# EAGLE board PIC32 dev board (EAGLE 6.5.0)
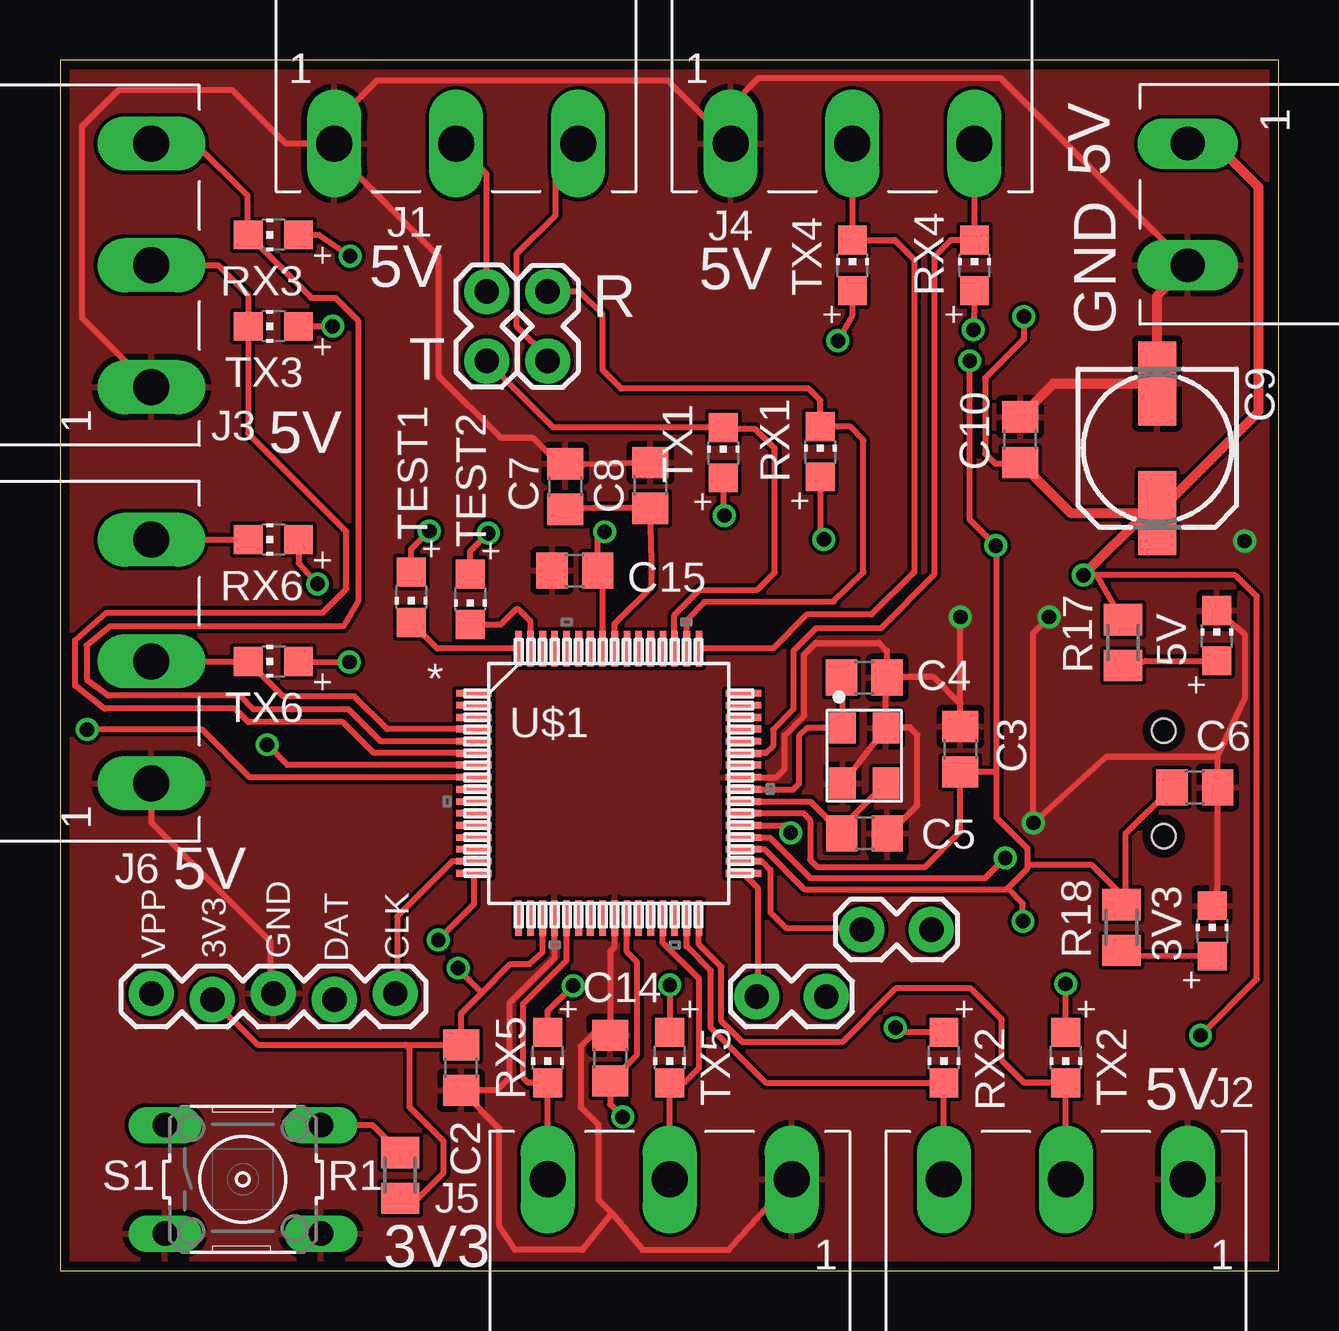
[diagram p0: board, top side]
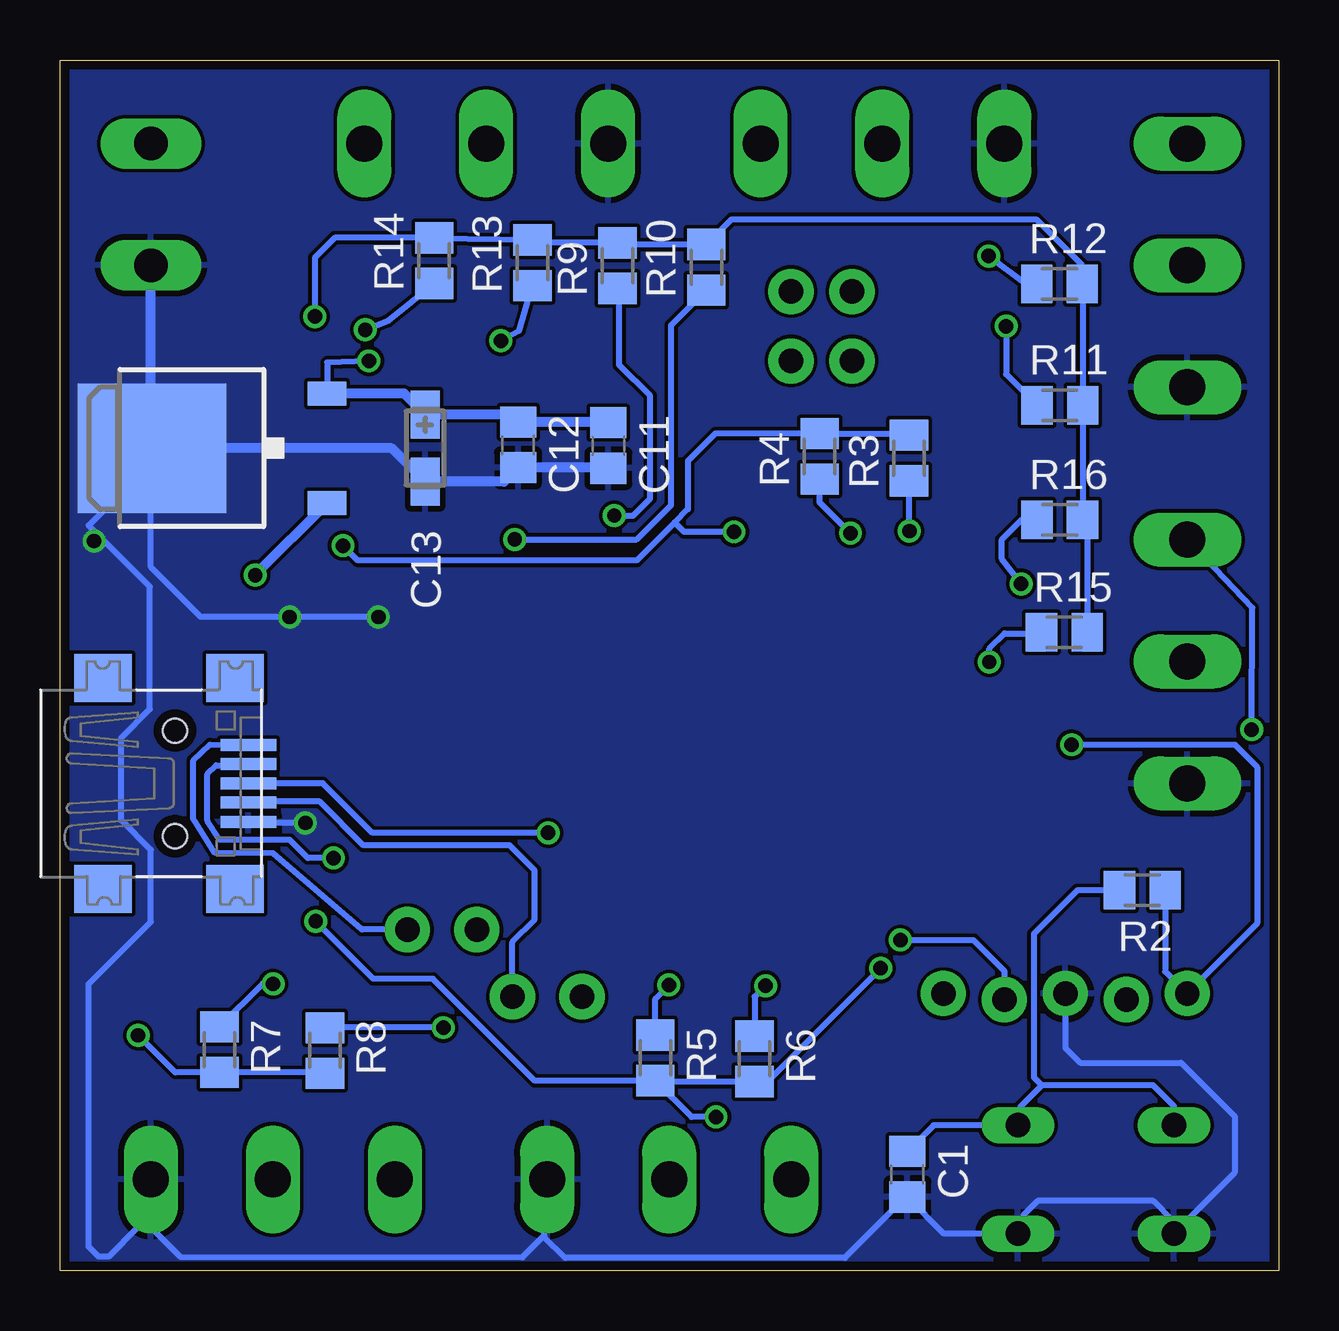
[diagram p1: board, bottom side, seen from below]

Size 50.78 x 50.47 mm. Coordinates in mm from the lower left corner, seen from the top.
Outline: 0,0 50.78,0 50.78,50.47 0,50.47 0,0
Copper layers (1*16): Top 0.0356mm / dielectric 1.5011mm / Bottom 0.0356mm
Design rules "LaenPCBOrder": minimum track width 6mil, minimum drill 13mil, track to track 6mil, track to pad 6mil, pad to pad 6mil, via to via 6mil, smd to smd 6mil, copper to edge 15mil, drill to drill 6mil, minimum pad ring 7mil, minimum via ring 7mil, stop-mask expansion 3mil, vias tented up to drill 0mil, thermal gap 10mil

## Footprints (pad centres in the part's own frame; a part is rotated, then mirrored left to right if it is on the bottom)
CHIP-LED0805 = smd 1.2 x 1.2: A 0,-1.05; C 0,1.05
C0805 = smd 1.3 x 1.5: 1 -0.95,0; 2 0.95,0
153CLV-0605 = smd 3.5 x 1.6: + 2.7,0; - -2.7,0
CT3216 = smd 2 x 1.2: + -1.4,0; - 1.4,0
USB-MINIB = smd 0.5 x 2.308: D+ 0,4.064; D- -0.8,4.064; GND 1.6,4.064; ID 0.8,4.064; VBUS -1.6,4.064 | smd 2 x 2.4: GND1 -4.4,-2; GND2 -4.4,3.5; GND3 4.4,3.5; GND4 4.4,-2 | hole 1: -2.2,1; 2.2,1
ECX-32 = smd 1.3 x 1.1: 1 -1.15,-0.9; 2 1.15,-0.9; 3 1.15,0.9; 4 -1.15,0.9
M3 = drill 1.5 long: 1 -5.08,0; 2 0,0; 3 5.08,0
M2 = drill 1.4 long: 1 -2.54,0; 2 2.54,0
1X05_LOCK = drill 1.016 pad 1.88: 1 0,0.127; 2 2.54,-0.127; 3 5.08,0.127; 4 7.62,-0.127; 5 10.16,0.127
1X02_LOCK = drill 1.016 pad 1.88: 1 -0.178,0; 2 2.718,0
M0805 = smd 1.3 x 1.6: 1 -0.95,0; 2 0.95,0
B3F-10XX = drill 1.016 long: 1 -3.251,2.261; 2 3.251,2.261; 3 -3.251,-2.261; 4 3.251,-2.261
TQFP64_10X10MC = smd 1.473 x 0.279: 1 -5.613,3.759; 2 -5.613,3.251; 3 -5.613,2.743; 4 -5.613,2.261; 5 -5.613,1.753; 6 -5.613,1.245; 7 -5.613,0.762; 8 -5.613,0.254; 9 -5.613,-0.254; 10 -5.613,-0.762; 11 -5.613,-1.245; 12 -5.613,-1.753; 13 -5.613,-2.261; 14 -5.613,-2.743; 15 -5.613,-3.251; 16 -5.613,-3.759; 33 5.613,-3.759; 34 5.613,-3.251; 35 5.613,-2.743; 36 5.613,-2.261; 37 5.613,-1.753; 38 5.613,-1.245; 39 5.613,-0.762; 40 5.613,-0.254; 41 5.613,0.254; 42 5.613,0.762; 43 5.613,1.245; 44 5.613,1.753; 45 5.613,2.261; 46 5.613,2.743; 47 5.613,3.251; 48 5.613,3.759 | smd 0.279 x 1.473: 17 -3.759,-5.613; 18 -3.251,-5.613; 19 -2.743,-5.613; 20 -2.261,-5.613; 21 -1.753,-5.613; 22 -1.245,-5.613; 23 -0.762,-5.613; 24 -0.254,-5.613; 25 0.254,-5.613; 26 0.762,-5.613; 27 1.245,-5.613; 28 1.753,-5.613; 29 2.261,-5.613; 30 2.743,-5.613; 31 3.251,-5.613; 32 3.759,-5.613; 49 3.759,5.613; 50 3.251,5.613; 51 2.743,5.613; 52 2.261,5.613; 53 1.753,5.613; 54 1.245,5.613; 55 0.762,5.613; 56 0.254,5.613; 57 -0.254,5.613; 58 -0.762,5.613; 59 -1.245,5.613; 60 -1.753,5.613; 61 -2.261,5.613; 62 -2.743,5.613; 63 -3.251,5.613; 64 -3.759,5.613
TO-252 = smd 5.4 x 6.2: GROUND 0,2.5 | smd 1 x 1.6: INPUT -2.28,-4.8; OUTPUT 2.28,-4.8

## Placement (x,y rotation side)
3V3  Green  [CHIP-LED0805]  48,14.17 0 top
5V  Green  [CHIP-LED0805]  48.2,26.48 0 top
C1  0.1 uF ceramic 50v  [C0805]  15.48,4.02 270 bottom
C2  0.1 uF ceramic 50v  [C0805]  16.71,8.47 270 top
C3  0.1 uF ceramic 50v  [C0805]  37.52,21.74 90 top
C4  30 pF ceramic 50v  [C0805]  33.51,24.72 0 top
C5  30 pF ceramic 50v  [C0805]  33.52,18.24 0 top
C6  0.1 uF ceramic 50v  [C0805]  47.28,20.15 0 top
C7  0.1 uF ceramic 50v  [C0805]  21.05,32.69 90 top
C8  optional 10 uF ceramic 50v  [C0805]  24.6,32.73 90 top
C9  100 uF aluminum 16v  [153CLV-0605]  45.72,34.29 270 top
C10  0.1 uF ceramic 50v  [C0805]  40.01,34.64 90 top
C11  0.1 uF ceramic 50v  [C0805]  27.93,34.4 270 bottom
C12  optional 0.1 uF ceramic 50v  [C0805]  31.69,34.42 270 bottom
C13  10uF tantilum 16v  [CT3216]  35.56,34.29 270 bottom
C14  0.1 uF ceramic 50v  [C0805]  22.93,8.86 90 top
C15  0.1 uF ceramic 50v  [C0805]  21.45,29.18 180 top
CN1  [USB-MINIB]  46.99,20.32 270 bottom
ECS-240-20-33-TR  CRYSTAL  [ECX-32]  33.51,21.47 270 top
J1  EUROMAG-390DEG  [M3]  16.51,46.99 0 top
J2  EUROMAG-390DEG  [M3]  41.91,3.81 180 top
J3  EUROMAG-390DEG  [M3]  3.81,41.91 90 top
J4  EUROMAG-390DEG  [M3]  33.02,46.99 0 top
J5  EUROMAG-390DEG  [M3]  25.4,3.81 180 top
J6  EUROMAG-390DEG  [M3]  3.81,25.4 90 top
J7  EUROMAG-290DEG  [M2]  46.99,44.45 270 top
JP1  [1X05_LOCK]  3.81,11.43 0 top
JP2  M02LOCK  [1X02_LOCK]  31.75,11.43 180 top
JP3  M02LOCK  [1X02_LOCK]  20.32,38.1 90 top
JP4  M02LOCK  [1X02_LOCK]  17.78,40.64 270 top
JP5  M02LOCK  [1X02_LOCK]  36.13,14.22 180 top
R1  10K  [M0805]  14.18,3.98 270 top
R2  499R  [M0805]  5.68,15.86 180 bottom
R3  330R  [M0805]  15.4,33.88 90 bottom
R4  330R  [M0805]  19.13,33.95 90 bottom
R5  665R  [M0805]  25.98,8.87 270 bottom
R6  665R  [M0805]  21.84,8.84 270 bottom
R7  1K  [M0805]  44.13,9.22 270 bottom
R8  1K  [M0805]  39.74,9.18 270 bottom
R9  1K  [M0805]  27.55,41.9 90 bottom
R10  1K  [M0805]  23.85,41.83 90 bottom
R11  1K  [M0805]  9.12,36.08 0 bottom
R12  1K  [M0805]  9.14,41.13 0 bottom
R13  1K  [M0805]  31.09,42.02 90 bottom
R14  1K  [M0805]  35.19,42.11 90 bottom
R15  1K  [M0805]  8.93,26.61 0 bottom
R16  1K  [M0805]  9.13,31.3 0 bottom
R17  1K  [M0805]  44.29,26.18 90 top
R18  665R  [M0805]  44.24,14.31 90 top
RX1  Green  [CHIP-LED0805]  31.68,34.14 0 top
RX2  Green  [CHIP-LED0805]  36.83,8.89 180 top
RX3  Green  [CHIP-LED0805]  8.89,43.18 90 top
RX4  Green  [CHIP-LED0805]  38.1,41.91 0 top
RX5  Green  [CHIP-LED0805]  20.32,8.89 180 top
RX6  Green  [CHIP-LED0805]  8.89,30.48 90 top
S1  [B3F-10XX]  7.62,3.81 0 top
TEST1  Blue  [CHIP-LED0805]  14.63,28.08 180 top
TEST2  Blue  [CHIP-LED0805]  17.1,27.99 180 top
TX1  Red  [CHIP-LED0805]  27.63,34.1 0 top
TX2  Red  [CHIP-LED0805]  41.91,8.89 180 top
TX3  Red  [CHIP-LED0805]  8.89,39.37 90 top
TX4  Red  [CHIP-LED0805]  33.02,41.91 0 top
TX5  Red  [CHIP-LED0805]  25.4,8.89 180 top
TX6  Red  [CHIP-LED0805]  8.89,25.4 90 top
U$1  PIC32MX575F512H-X_PT  [TQFP64_10X10MC]  22.86,20.32 0 top
U$2  LP2950  [TO-252]  44.45,34.29 90 bottom

## Library data of the parts
3V3 5V CN1 RX1-RX6 TEST1 TEST2 TX1-TX6 = adafruit
C1-C15 R1-R18 = rcl
ECS-240-20-33-TR = Crystal ECS
J1-J7 U$2 = NASA_LIB
JP1-JP5 = SparkFun-Connectors
S1 = switch-omron; MPN: B3F-1000; OC_FARNELL: 176432; OC_NEWARK: 36M3542
U$1 = Pic32

## Nets
+3V3: C2.1 C3.1 C6.1 C11.1 C12.1 C13.+ C14.1 C15.1 JP1.2 R1.2 R3.2 R4.2 R5.2 R6.2 R18.2 U$1.19 U$1.26 U$1.35 U$1.38 U$1.57 U$2.OUTPUT
+5V: C9.+ C10.1 J7.1 R7.2 R8.2 R9.2 R10.2 R11.2 R12.2 R13.2 R14.2 R15.2 R16.2 R17.2 U$2.INPUT
GND: 3V3.C 5V.C C1.2 C2.2 C3.2 C4.2 C5.2 C6.2 C7.2 C8.2 C9.- C10.2 C11.2 C12.2 C13.- C14.2 C15.2 CN1.GND ECS-240-20-33-TR.2 ECS-240-20-33-TR.4 J1.1 J2.1 J3.1 J4.1 J5.1 J6.1 J7.2 JP1.3 S1.3 S1.4 U$1.20 U$1.25 U$1.41 U$2.GROUND
N$1: J5.2 TX5.C U$1.29
N$2: J5.3 RX5.C U$1.21
N$3: J1.2 JP4.1
N$4: J1.3 JP3.1
N$5: J4.2 TX4.C U$1.49
N$6: JP3.2 RX1.C U$1.50
N$7: J2.2 TX2.C U$1.32
N$8: J2.3 RX2.C U$1.31
N$9: J3.2 TX3.C U$1.6
N$10: J3.3 RX3.C U$1.5
N$11: J6.2 TX6.C U$1.4
N$12: J6.3 RX6.C U$1.8
N$13: JP1.1 R2.1 U$1.7
N$14: JP1.4 U$1.16
N$15: JP1.5 U$1.15
N$16: C1.1 R1.1 R2.2 S1.1 S1.2
N$17: C7.1 C8.1 U$1.56
N$18: C4.1 ECS-240-20-33-TR.1 U$1.40
N$19: C5.1 ECS-240-20-33-TR.3 U$1.39
N$20: CN1.D+ U$1.37
N$21: CN1.D- U$1.36
N$22: CN1.VBUS JP5.1
N$23: CN1.ID JP2.1
N$24: TEST2.C U$1.63
N$25: TEST1.C U$1.64
N$26: R3.1 TEST1.A
N$27: R4.1 TEST2.A
N$28: R5.1 TX5.A
N$29: R6.1 RX5.A
N$30: R7.1 TX2.A
N$31: R8.1 RX2.A
N$32: R9.1 TX1.A
N$33: R10.1 RX1.A
N$34: R11.1 TX3.A
N$35: R12.1 RX3.A
N$36: R13.1 TX4.A
N$37: R14.1 RX4.A
N$38: R15.1 TX6.A
N$39: R16.1 RX6.A
N$40: JP2.2 U$1.33
N$41: JP4.2 TX1.C U$1.51
N$42: J4.3 RX4.C U$1.43
N$43: JP5.2 U$1.34
N$46: 5V.A R17.1
N$47: 3V3.A R18.1

## Tracks (layer width: path | path; a pad name or v marks a point on that pad's centre or on a via)
+3V3  (via drill 0.6)
  Top 0.254: U$1.38 30.97,19.07 31.25,18.79 31.25,17.13 31.55,16.84 36.05,16.84 37.52,18.3 C3.1 39.02,20.79 39.02,20.8 | U$1.35 29.34,17.58 31.01,15.9 39.45,15.9 39.48,15.94 | 17.57,11.58 16.71,10.72 C2.1 14.4,9.42 | 17.57,11.58 18.77,12.78 19.57,12.78 20.11,13.28 20.11,14.65 U$1.19 | U$1.26 23.62,14.67 23.62,13.3 24.04,12.86 24.04,9.01 22.95,7.91 C14.1 22.93,6.93 v23.45,6.41 | 39.48,15.94 40.32,16.78 40.32,16.92 | 40.32,16.92 40.32,17.59 39.02,18.88 39.02,20.8 | 39.02,20.8 39.02,30.19 v38.99,30.23 37.91,31.31 37.91,37.97 v37.91,37.93 | R18.2 44.4,15.52 | 44.4,15.52 43,16.92 40.32,16.92 | C6.1 44.4,18.21 44.4,15.52 | JP1.2 8.23,9.42 14.4,9.42 | R1.2 14.92,3.02 15.98,4.09 15.98,5.4 14.57,6.81 14.57,9.25 14.4,9.42 | v16.59,12.62 16.59,12.56 17.57,11.58 | v40.12,14.57 40.12,15.3 39.48,15.94 | U$1.57 22.61,28.98 C15.1 22.4,30.51 v22.7,30.8
  Bottom 0.254: v37.91,37.93 39.65,37.86 U$2.OUTPUT | 25.17,31.19 24.62,31.74 24.62,33.76 23.47,34.9 R4.2 15.47,34.9 R3.2 | 25.17,31.19 26.75,29.61 38.37,29.61 v38.99,30.23 | v16.59,12.62 21.32,7.88 R6.2 25.94,7.88 R5.2 | R5.2 31,7.92 35.25,12.18 37.73,12.18 v40.12,14.57 | v23.45,6.41 24.46,6.41 R5.2 | v22.7,30.8 24.77,30.8 25.17,31.19
  Bottom 0.406: C11.1 27.96,35.38 C12.1 32.01,35.69 C13.+ 36.44,36.57 U$2.OUTPUT
+5V  (via drill 0.6)
  Top 0.254: R17.2 43.2,29 v42.64,29 48.98,29 49.87,28.11 49.87,12.16 v47.52,9.81 | v40.16,39.77 40.16,38.83 38.55,37.22 38.55,34.06 38.97,33.64 39.95,33.64 C10.1
  Top 0.406: C9.+ 49.95,35.82 49.95,45.17 48.13,46.99 J7.1 | C10.1 42.11,31.59 C9.+ | v42.64,29 45.24,31.59 C9.+
  Bottom 0.254: v40.16,39.77 40.16,42.23 39.33,43.06 R14.2 35.16,43.03 R13.2 30.97,42.84 R9.2 27.48,42.78 R10.2 22.8,43.83 10.1,43.83 8.19,41.91 R12.2 8.17,41.12 R11.2 8.18,35.35 R16.2 7.98,30.97 R15.2 | v47.52,9.81 45.98,8.27 R7.2 39.78,8.27 R8.2
  Bottom 0.406: U$2.INPUT 42.64,29.02 v42.64,29
GND  (via drill 0.6)
  Top 0.254: 34.96,18.53 34.59,18.16 C5.2 34.56,18.24 35.72,19.4 35.72,22.34 35.41,22.65 34.44,22.65 ECS-240-20-33-TR.4 | ECS-240-20-33-TR.4 34.41,24.67 C4.2 | ECS-240-20-33-TR.4 ECS-240-20-33-TR.2 | C3.2 37.52,23.63 | 37.52,23.63 36.41,24.75 34.49,24.75 C4.2 | U$1.41 29.85,20.57 30.19,20.91 30.19,22.32 31.02,23.15 31.02,25.7 31.49,26.18 34.12,26.18 34.46,25.84 C4.2 | C8.2 21.81,33.6 C7.2 21,33.63 20.92,33.5 19.7,34.73 18.36,34.73 15.77,37.32 15.77,42.3 11.43,46.64 J1.1 | U$1.20 20.6,13.02 18.72,11.15 18.72,8.04 18.19,7.51 C2.2 18.31,5.92 18.31,1.87 18.96,0.87 21.77,0.87 22.97,2.38 23.03,2.38 | U$1.25 23.11,13.5 22.93,13.31 22.93,10.19 | 3V3.C 48.23,15.97 C6.2 48.23,21.4 48.22,21.41 | 5V.C 49.36,26.55 49.36,23.85 48.22,21.41 | 48.22,21.41 43.58,21.41 v40.56,18.67 40.56,26.59 v41.22,27.25 | 37.52,23.63 v37.52,27.25 v37.51,27.25 | J6.1 3.81,18.68 8.77,13.72 8.77,11.68 JP1.3 | 22.93,10.19 C14.2 | 22.93,10.19 22.53,10.19 21.69,9.36 21.69,6.83 22.43,6.1 22.43,2.98 23.03,2.38 | 23.03,2.38 24.27,0.87 27.85,0.87 J5.1 | J7.2 39.17,49.73 29.12,49.73 27.94,48.54 J4.1 25.31,49.62 13.21,49.62 11.43,47.84 J1.1 | J1.1 9.4,46.99 7.18,49.2 2.42,49.2 0.91,47.7 0.91,39.73 J3.1
  Top 0.406: J7.2 45.72,40.64 C9.- 41.4,36.99 C10.2
  Bottom 0.254: v40.56,18.67 42.87,18.67 CN1.GND | 46.99,33.66 46.99,29.33 44.92,27.25 v41.22,27.25 v37.51,27.25 | 46.99,33.66 46.99,34.25 U$2.GROUND | 30.59,1.48 30.62,1.43 29.73,0.54 18.07,0.54 15.54,3.07 C1.2 13.95,1.55 S1.4 10.64,1.78 10.64,2.32 10.05,2.91 5.23,2.91 4.37,2.05 S1.3 1.83,4.08 1.83,6.44 4.06,8.67 8.27,8.67 8.89,9.29 JP1.3 | 46.99,1.81 45.78,0.59 31.52,0.56 30.59,1.48 | 46.99,1.81 47.54,1.81 48.75,0.59 49.17,0.59 49.58,1.01 49.58,11.96 47,14.54 47,17.55 48.23,18.78 48.23,22.21 47.03,23.41 47.03,28.52 49.58,31.07 46.99,33.66 | J2.1 46.99,1.81 | 30.59,1.48 30.62,3.67 J5.1
  Bottom 0.406: C11.2 27.96,33.48 C12.2 32.28,32.89 C13.- 36.96,34.29 U$2.GROUND 46.99,34.33 J7.2
  other vias: 49.36,30.42
  pour Top: 0.26,50.2 0.31,0.31 50.48,0.24 50.58,50.26 0.36,50.26
  pour Bottom: 0.17,50.33 0.17,0.17 50.7,0.17 50.7,50.33
  pour Bottom (no thermals): 43.1,38.6 43.1,30.36 50.39,30.36 50.39,38.6 43.13,38.6
N$1
  Top 0.254: J5.2 TX5.C 26.01,7.84 26.63,8.46 26.63,12.16 25.12,13.67 U$1.29
N$2
  Top 0.254: J5.3 RX5.C 19.5,7.84 19.29,8.05 19.29,11.13 21.11,12.95 U$1.21
N$3
  Top 0.254: JP4.1 17.78,45.72 J1.2
N$4
  Top 0.254: JP3.1 20.32,38.08 19.04,39.36 19.04,42.4 20.65,44.01 20.65,46.05 J1.3
N$5
  Top 0.254: J4.2 TX4.C 34.79,42.96 35.6,42.15 35.6,29.14 33.81,27.34 31.12,27.34 29.72,25.94 26.63,25.94 U$1.49
N$6
  Top 0.254: 20.33,40.81 JP3.2 21.66,40.81 22.61,39.87 22.61,37.54 23.38,36.77 31.2,36.77 31.68,36.29 RX1.C 31.69,35.18 32.92,35.18 33.48,34.62 33.48,29.11 32.23,27.89 26.86,27.89 26.11,27.12 U$1.50
N$7
  Top 0.254: J2.2 TX2.C 40.18,7.84 39.24,8.78 39.24,10.48 37.96,11.76 34.82,11.76 32.59,9.52 28.44,9.52 27.55,10.41 27.55,12.67 26.62,13.61 U$1.32
N$8
  Top 0.254: J2.3 RX2.C 29.4,7.84 27.12,10.12 27.12,12.51 26.11,13.52 U$1.31
N$9
  Top 0.254: J3.2 6.6,41.91 7.84,40.67 TX3.C 7.84,34.9 11.94,30.8 11.94,28.42 10.95,27.43 1.94,27.43 0.63,26.27 0.63,24.39 1.85,23.43 7.28,23.43 7.85,22.87 11.79,22.87 13.06,21.59 17.22,21.59 U$1.6
N$10
  Top 0.254: J3.3 5.64,46.99 7.81,44.83 7.81,43.21 RX3.C 10.46,40.55 11.47,40.55 12.42,39.61 12.42,27.91 11.79,26.86 2.08,26.86 1.11,26.07 1.12,24.63 2.01,23.97 7.49,23.97 8.06,23.41 12.03,23.41 13.36,22.07 U$1.5
N$11
  Top 0.254: J6.2 TX6.C 9.3,23.94 12.26,23.94 13.63,22.58 U$1.4
N$12  (via drill 0.6)
  Top 0.254: J6.3 RX6.C | U$1.8 7.9,20.57 5.92,22.56 v1.13,22.56
  Bottom 0.254: v1.13,22.56 1.1,27.63 J6.3
N$13  (via drill 0.6)
  Top 0.254: U$1.7 9.48,21.08 v8.63,21.93
  Bottom 0.254: v8.63,21.93 1.83,21.93 0.9,21 0.9,14.47 JP1.1 4.73,12.48 R2.1
N$14  (via drill 0.6)
  Top 0.254: U$1.16 17.25,15.27 v15.76,13.79
  Bottom 0.254: v15.76,13.79 12.72,13.79 11.43,12.5 JP1.4
N$15
  Top 0.254: U$1.15 16.35,17.07 14.04,14.76 14.04,11.63 JP1.5
N$16
  Top 0.254: R1.1 13.03,6.07 S1.2
  Bottom 0.254: C1.1 14.38,6.07 S1.2 10.76,6.18 10.76,6.84 9.87,7.73 | S1.1 4.37,6.87 5.23,7.73 9.87,7.73 | R2.2 8.39,15.86 10.2,14.05 10.2,8.06 9.87,7.73
N$17
  Top 0.254: U$1.56 23.11,26.98 24.65,28.51 24.65,29.56 C8.1 22.21,31.79 C7.1
N$18
  Top 0.254: U$1.40 28.49,20.05 30.54,20.05 30.79,20.3 30.79,22.3 31.11,22.62 ECS-240-20-33-TR.1 32.61,24.68 C4.1
N$19
  Top 0.254: U$1.39 31.26,19.56 C5.1 32.58,18.49 ECS-240-20-33-TR.3
N$20  (via drill 0.6)
  Top 0.254: U$1.37 30.21,18.57 v30.44,18.25
  Bottom 0.254: v30.44,18.25 37.76,18.25 39.83,20.32 CN1.D+
N$21  (via drill 0.6)
  Top 0.254: U$1.36 29.57,18.06 31.25,16.37 38.56,16.37 v39.38,17.2
  Bottom 0.254: v39.38,17.2 40.46,17.2 41.22,17.96 44.13,17.96 44.63,18.75 44.63,20.71 44.27,21.07 42.98,21.07 CN1.D-
N$22
  Bottom 0.254: JP5.1 38.2,14.22 41.9,17.4 44.32,17.42 45.23,18.85 45.23,21.28 44.52,21.93 CN1.VBUS
N$23
  Bottom 0.254: JP2.1 31.93,13.7 31,14.63 31,16.69 32.05,17.73 38.13,17.73 39.96,19.55 42.89,19.55 CN1.ID
N$24
  Top 0.254: U$1.63 19.61,27.07 19.1,27.58 19.01,27.58 18.35,26.93 17.11,26.93 TEST2.C
N$25
  Top 0.254: U$1.64 15.72,25.93 TEST1.C
N$26  (via drill 0.6)
  Top 0.254: TEST1.A 14.63,30.08 v15.39,30.84
  Bottom 0.254: v15.39,30.84 R3.1
N$27  (via drill 0.6)
  Top 0.254: TEST2.A 17.1,30 v17.84,30.75
  Bottom 0.254: v17.84,30.75 19.13,32.03 R4.1
N$28  (via drill 0.6)
  Top 0.254: v25.41,11.91 TX5.A
  Bottom 0.254: R5.1 25.98,11.34 v25.41,11.91
N$29  (via drill 0.6)
  Top 0.254: RX5.A 20.32,10.83 v21.38,11.88
  Bottom 0.254: v21.38,11.88 21.84,11.42 R6.1
N$30  (via drill 0.6)
  Top 0.254: TX2.A v41.91,11.96 v41.9,11.96
  Bottom 0.254: v41.9,11.96 42.34,11.96 R7.1
N$31  (via drill 0.6)
  Top 0.254: RX2.A 35.01,9.94 v34.81,10.14
  Bottom 0.254: v34.81,10.14 R8.1
N$32  (via drill 0.6)
  Top 0.254: TX1.A 27.63,31.53 v27.68,31.48
  Bottom 0.254: v27.68,31.48 26.9,31.48 26.2,32.18 26.2,36.47 27.48,37.76 27.48,40.88 R9.1
N$33  (via drill 0.6)
  Top 0.254: RX1.A 31.68,30.64 v31.83,30.49
  Bottom 0.254: v31.83,30.49 26.75,30.49 25.32,31.92 25.32,39.41 R10.1
N$34  (via drill 0.6)
  Top 0.254: TX3.A 10.3,39.37 v11.36,39.37
  Bottom 0.254: v11.36,39.37 11.36,37.37 R11.1
N$35  (via drill 0.6)
  Top 0.254: RX3.A 10.78,43.18 v12.09,42.3
  Bottom 0.254: v12.09,42.3 10.53,41.13 R12.1
N$36  (via drill 0.6)
  Top 0.254: TX4.A 33.02,39.82 v32.41,38.76
  Bottom 0.254: v32.41,38.76 31.65,39.18 R13.1
N$37  (via drill 0.6)
  Top 0.254: RX4.A 38.1,40.13 v38.06,39.23
  Bottom 0.254: v38.06,39.23 37.1,39.6 R14.1
N$38  (via drill 0.6)
  Top 0.254: TX6.A 9.96,25.38 v12.06,25.38
  Bottom 0.254: v12.06,25.38 12.06,25.93 11.42,26.57 9.92,26.57 R15.1
N$39  (via drill 0.6)
  Top 0.254: RX6.A 9.94,29.51 v10.73,28.63
  Bottom 0.254: v10.73,28.63 11.54,29.67 11.54,30.49 10.72,31.3 R16.1
N$40
  Top 0.254: JP2.2 29.06,11.46 29.06,15.97 U$1.33
N$41
  Top 0.254: JP4.2 20.55,35.15 TX1.C 27.69,35.09 28.97,35.09 29.78,34.28 29.78,29.11 29.05,28.38 26.64,28.38 25.6,27.34 U$1.51
N$42
  Top 0.254: J4.3 RX4.C 37.11,42.96 36.42,42.28 36.42,29.01 34.19,26.78 31.49,26.78 30.56,25.84 30.56,23.4 29.71,22.55 29.71,21.89 29.4,21.57 28.48,21.57 U$1.43
N$43
  Top 0.254: U$1.34 28.5,17.08 29.24,17.08 29.59,16.72 29.59,14.94 30.23,14.3 33.33,14.3 JP5.2
N$46
  Top 0.254: R17.1 45.25,25.43 5V.A
N$47
  Top 0.254: R18.1 44.87,13.15 3V3.A

## Text on the board
tNames: 5V | GND | 5V | 5V | R | T | 5V | 5V | VPP | 3V3 | GND | DAT | CLK | 5V | 3V3